# Altium PCB pcb_LAB_GNDplane.PcbDoc
Units mil, origin at the board's own origin, x right, y up, seen from the top; angles counter-clockwise.
Board outline 10930 x 11320 mil, 2 copper layers (Top Layer, Bottom Layer); 127 components, 63 nets, 386 pads, 33 vias.
Unrouted connection lines stored in the file: 1.
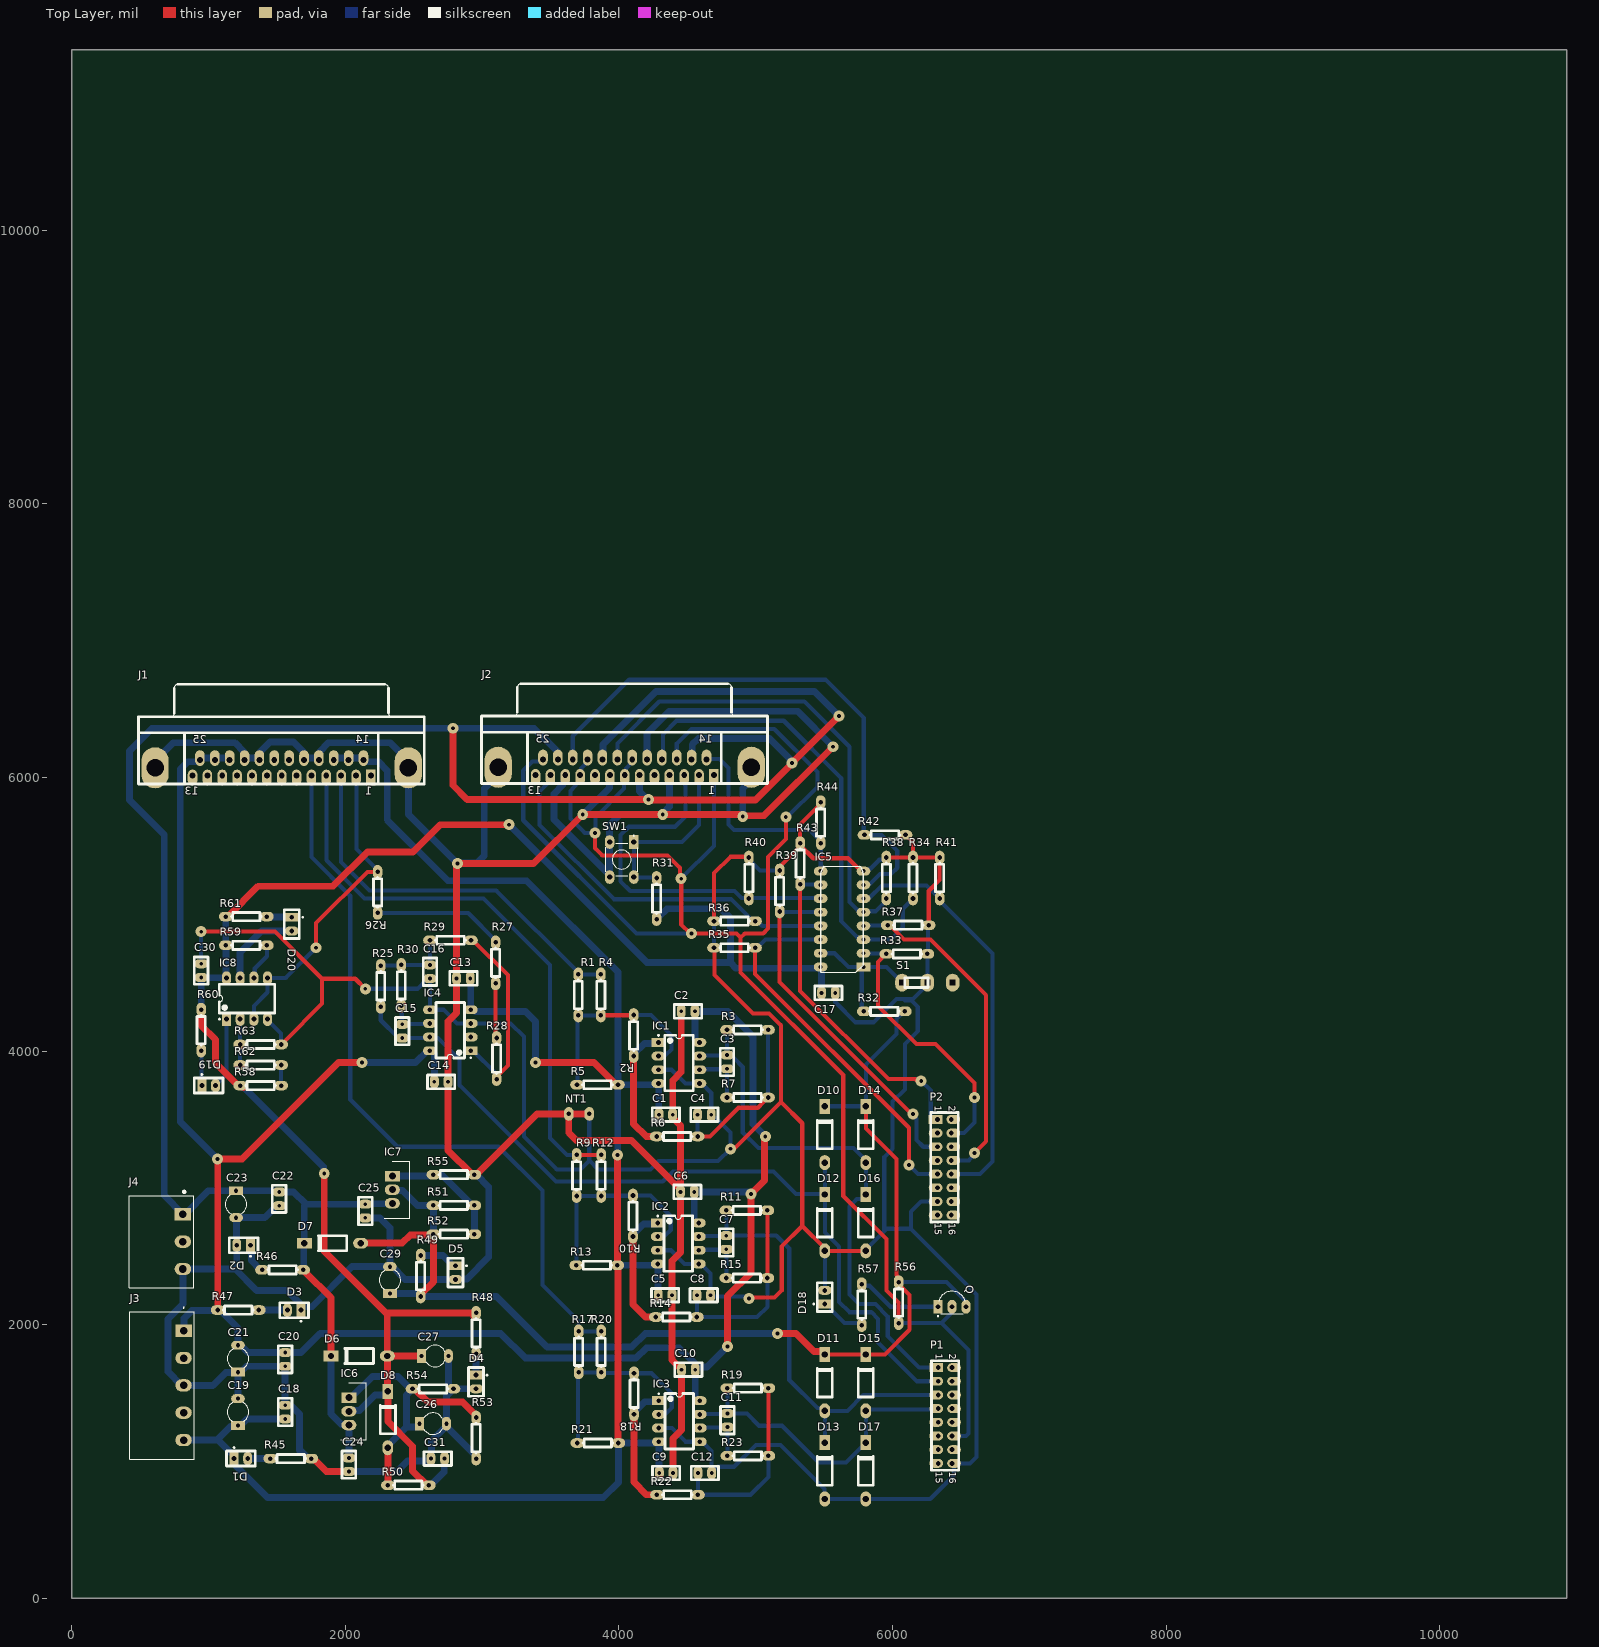
[diagram p0: Top Layer view]
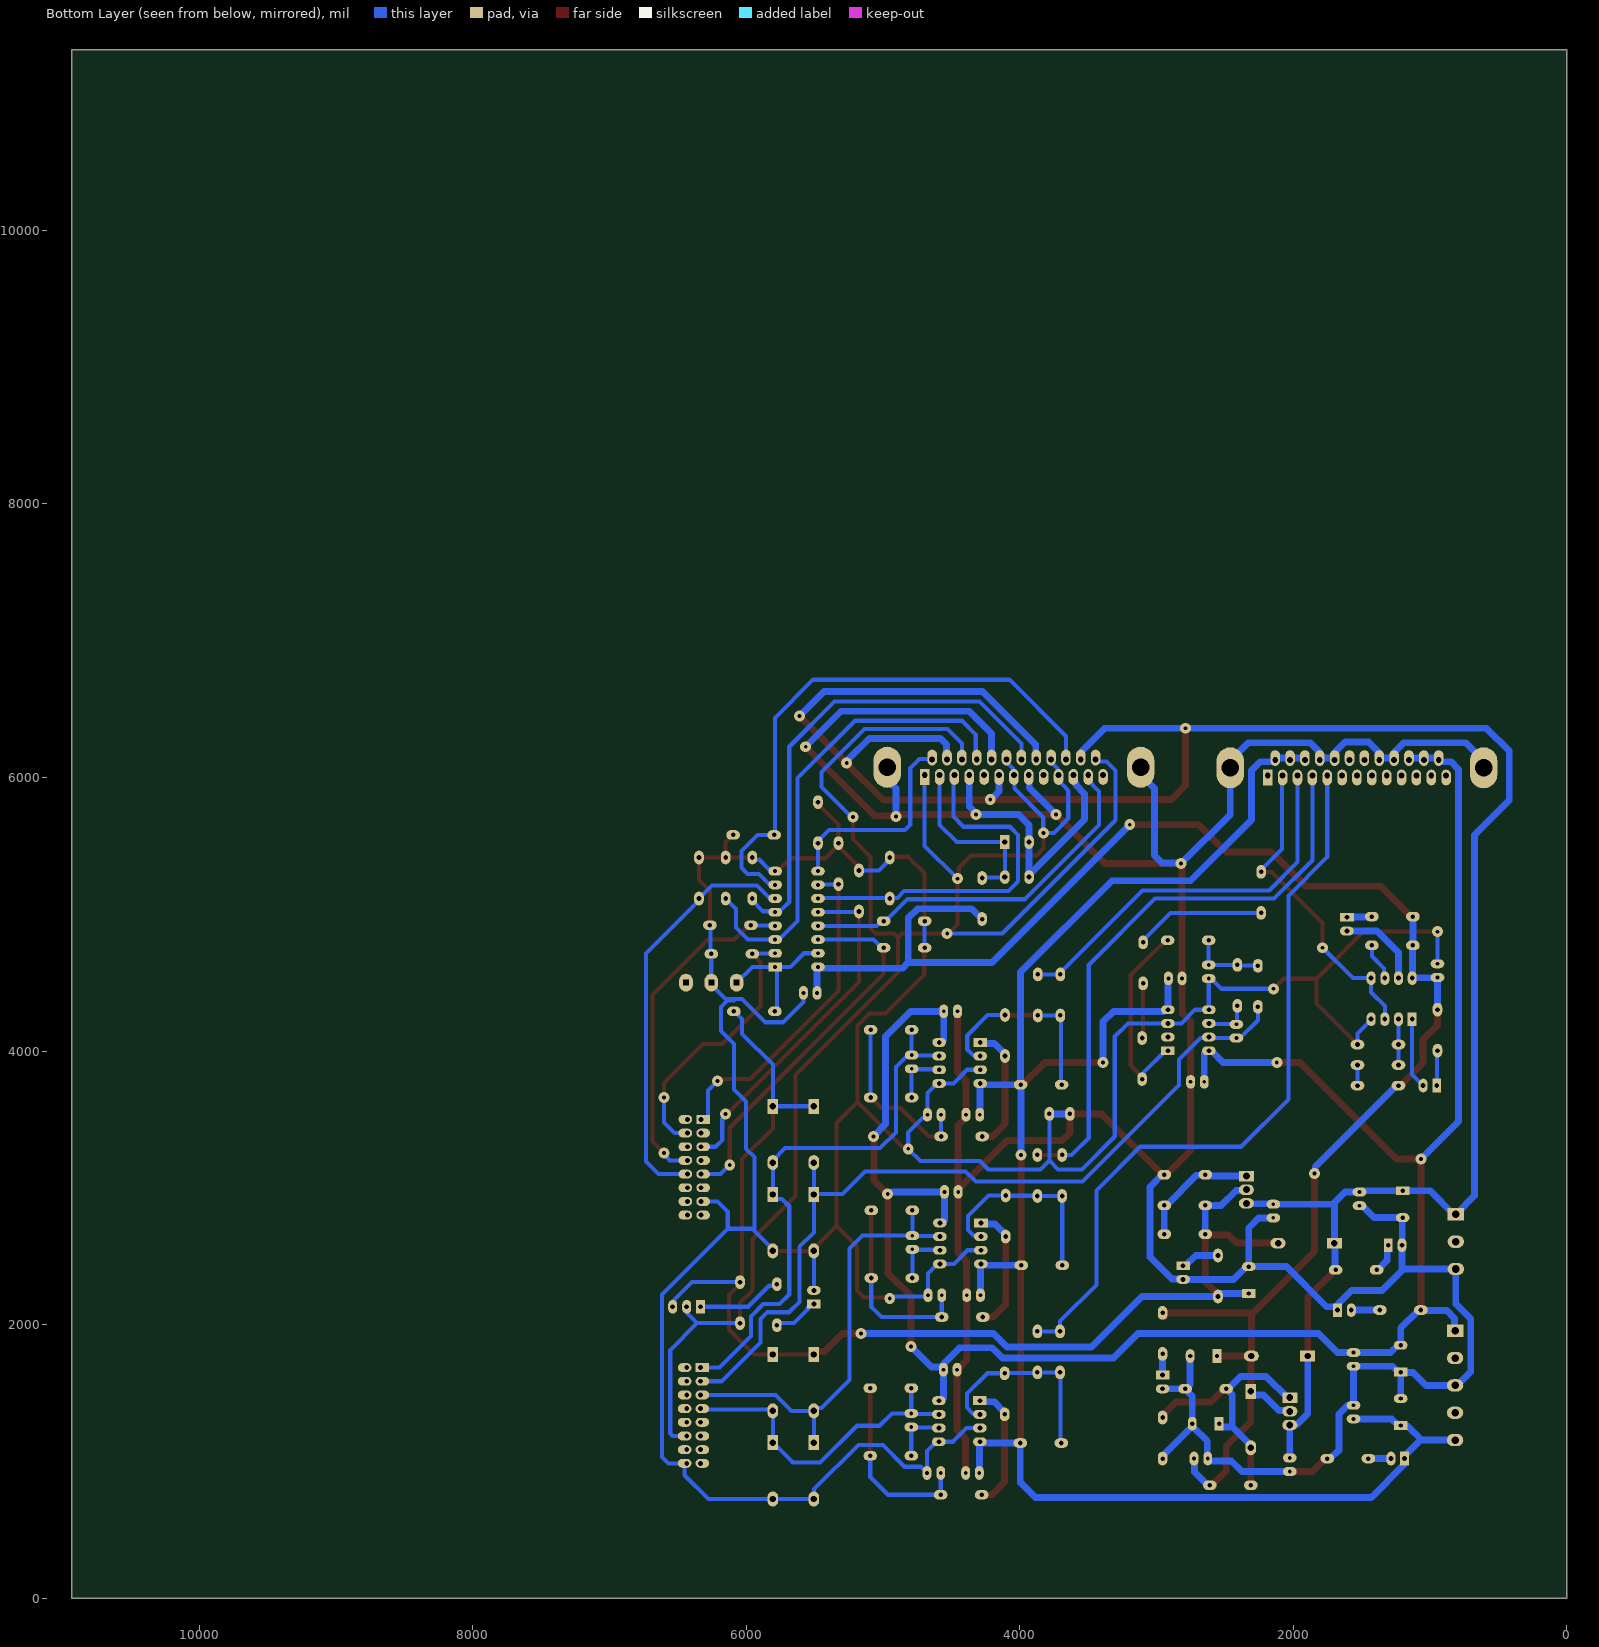
[diagram p1: Bottom Layer view, seen from below]

## Layer stack, top to bottom
Top Solder: solder mask 0.4, Solder Resist, Dk 3.5
Top Layer: signal copper 1.4
Dielectric 1: dielectric 12.6, FR-4, Dk 4.8
Bottom Layer: signal copper 1.4
Bottom Solder: solder mask 0.4, Solder Resist, Dk 3.5

## Board outline
0,0 10930,0 10930,11320 0,11320

## Design rules (kind name [scope] priority, off if disabled: settings)
Clearance [All] p1: gap=40 ignorepadtopadclearanceinfootprint=FALSE except(10: Arc-SMDPad Arc-Text Arc-Hole Track-SMDPad Track-Text Track-Hole SMDPad-SMDPad SMDPad-THPad SMDPad-Text SMDPad-Hole THPad-THPad THPad-Text THPad-Hole Via-Text Via-Hole Fill-Text Fill-Hole Poly-Text Poly-Hole Region-Text Region-Hole Text-Text Text-Hole; 30: Arc-Arc Arc-Track Arc-THPad Arc-Via Track-Track Track-THPad Track-Via SMDPad-Via THPad-Via Via-Via)
PolygonConnect [All] p1: connectstyle=Relief reliefconductorwidth=10 reliefentries=4 polygonreliefangle="90 Angle" airgapwidth=10
RoomDefinition Texas_ADC [InComponentClass('Texas_ADC')] p1: confinementstyle=ConfineIn formatcopy=TRUE lockcomponents=FALSE outline 6762.5,530.11 6762.5,3795 5393.29,3795 5393.29,530.11
RoomDefinition Guasch_Control [InComponentClass('Guasch_Control')] p2: confinementstyle=ConfineIn formatcopy=TRUE lockcomponents=FALSE outline 5400,4860 5400,6735 2715,6735 2715,4860
RoomDefinition CurrentU_Signal [InComponentClass('CurrentU_Signal')] p3: confinementstyle=ConfineIn formatcopy=TRUE lockcomponents=FALSE outline 5247.35,4635 3560,4635 3560,3270 5247.35,3270
RoomDefinition PWM_Driver [InComponentClass('PWM_Driver')] p4: confinementstyle=ConfineIn formatcopy=TRUE lockcomponents=FALSE outline 6870,5895 4521.3,5895 4521.3,4065 6870,4065
RoomDefinition CurrentV_Signal [InComponentClass('CurrentV_Signal')] p5: confinementstyle=ConfineIn formatcopy=TRUE lockcomponents=FALSE outline 5242.35,3321.58 3555,3321.58 3555,1950 5242.35,1950
RoomDefinition Voltage_Signal [InComponentClass('Voltage_Signal')] p6: confinementstyle=ConfineIn formatcopy=TRUE lockcomponents=FALSE outline 2115,3645.16 3457.9,3645.16 3457.9,5385 2115,5385
RoomDefinition Power_Supply [InComponentClass('Power_Supply')] p7: confinementstyle=ConfineIn formatcopy=TRUE lockcomponents=FALSE outline 340,3525 340,555 3265,555 3265,3525
RoomDefinition Guasch_Sensor [InComponentClass('Guasch_Sensor')] p8: confinementstyle=ConfineIn formatcopy=TRUE lockcomponents=FALSE outline 2828.78,5694.92 2828.78,6724.92 353.78,6724.92 353.78,5694.92
RoomDefinition VDC_Indicator [InComponentClass('VDC_Indicator')] p9: confinementstyle=ConfineIn formatcopy=TRUE lockcomponents=FALSE outline 707.02,5147.96 707.02,3527.96 1729.52,3527.96 1729.52,5147.96
RoomDefinition CurrentW_Signal [InComponentClass('CurrentW_Signal')] p10: confinementstyle=ConfineIn formatcopy=TRUE lockcomponents=FALSE outline 5250,2010 3562.65,2010 3562.65,650.16 5250,650.16
RoomDefinition Texas_PWM [InComponentClass('Texas_PWM')] p11: confinementstyle=ConfineIn formatcopy=TRUE lockcomponents=FALSE outline 6135,2610 6675,2610 6675,3990 6135,3990
RoutingVias [All] p1: holewidth=30 width=80 viastyle="Through Hole" minholewidth=30 minwidth=80 maxholewidth=30 maxwidth=80
SolderMaskExpansion [All] p1: expansion=4 istentingtop=FALSE
SupplyNets "Schematic Supply Nets_6" [InNet('sigGND')] p1: voltage=0.000
SupplyNets "Schematic Supply Nets_5" [InNet('GND')] p2: voltage=0.000
SupplyNets "Schematic Supply Nets_4" [InNet('+12V')] p3: voltage=0.000
SupplyNets "Schematic Supply Nets_3" [InNet('+5V')] p4: voltage=0.000
SupplyNets "Schematic Supply Nets_2" [InNet('+3V3')] p5: voltage=0.000
SupplyNets "Schematic Supply Nets_1" [InNet('-15V')] p6: voltage=0.000
SupplyNets "Schematic Supply Nets" [InNet('+15V')] p7: voltage=0.000
Width Width_sigGND [InNet('sigGND')] p1: maxlimit=30 minlimit=30 preferedwidth=30
Width Width_Supply [InNetClass('Supply')] p2: maxlimit=50 minlimit=50 preferedwidth=50
Width Width_5V [InNet('+5V')] p3: maxlimit=50 minlimit=50 preferedwidth=50
Width Width_3V3 [InNet('+3V3')] p4: maxlimit=50 minlimit=30 preferedwidth=30 minimp=50.000000 maximp=50.000000 favimp=50.000000
Width [All] p5: maxlimit=50 minlimit=30 preferedwidth=30
30 further rules are at their usual default settings.

## Classes and differential pairs
component class main: NT1
net class Supply: +12V +15V -15V GND
component class Voltage_Signal: C13 C14 C15 C16 IC4 R25 R26 R27 R28 R29 R30
component class VDC_Indicator: C30 D19 D20 IC8 R58 R59 R60 R61 R62 R63
component class Texas_PWM: P2
component class Texas_ADC: D10 D11 D12 D13 D14 D15 D16 D17 D18 P1 Q R56 R57
component class PWM_Driver: C17 IC5 R32 R33 R34 R35 R36 R37 R38 R39 R40 R41 R42 R43 R44 S1
component class Power_Supply: C18 C19 C20 C21 C22 C23 C24 C25 C26 C27 C29 C31 D1 D2 D3 D4 D5 D6 D7 D8 IC6 IC7 J3 J4 R45 R46 R47 R48 R49 R50 R51 R52 R53 R54 R55
component class Guasch_Sensor: J1
component class Guasch_Control: J2 R31 SW1
component class CurrentW_Signal: C9 C10 C11 C12 IC3 R17 R18 R19 R20 R21 R22 R23
component class CurrentV_Signal: C5 C6 C7 C8 IC2 R9 R10 R11 R12 R13 R14 R15
component class CurrentU_Signal: C1 C2 C3 C4 IC1 R1 R2 R3 R4 R5 R6 R7

## Components (designator, comment, footprint, x,y, rotation, side; value= is the part's Value field where it differs from the comment)
C1 "Cap No Pol" RAD-0.1_mod 4342.35,3534.27 r0 top value=100nF
C2 "Cap No Pol" RAD-0.1_mod 4505,4290 r0 top value=100nF
C3 "Cap No Pol" RAD-0.1_mod 4790,3920 r90 top value=10nF
C4 "Cap No Pol" RAD-0.1_mod 4624.85,3534.27 r0 top value=47nF
C5 "Cap No Pol" RAD-0.1_mod 4337.35,2214.27 r0 top value=100nF
C6 "Cap No Pol" RAD-0.1_mod 4500,2970 r0 top value=100nF
C7 "Cap No Pol" RAD-0.1_mod 4785,2600 r90 top value=10nF
C8 "Cap No Pol" RAD-0.1_mod 4619.85,2214.27 r0 top value=47nF
C9 "Cap No Pol" RAD-0.1_mod 4345,914.43 r0 top value=100nF
C10 "Cap No Pol" RAD-0.1_mod 4507.65,1670.16 r0 top value=100nF
C11 "Cap No Pol" RAD-0.1_mod 4792.65,1300.16 r90 top value=10nF
C12 "Cap No Pol" RAD-0.1_mod 4627.5,914.43 r0 top value=47nF
C13 "Cap No Pol" RAD-0.1_mod 2862.65,4530.73 r180 top value=100nF
C14 "Cap No Pol" RAD-0.1_mod 2700,3775 r180 top value=100nF
C15 "Cap No Pol" RAD-0.1_mod 2415,4145 r270 top value=10nF
C16 "Cap No Pol" RAD-0.1_mod 2617.9,4579.74 r90 top value=47nF
C17 "Cap No Pol" RAD-0.1_mod 5531.3,4425 r0 top value=100nF
C18 "Cap No Pol" RAD-0.1_mod 1558.84,1360.01 r90 top value=100nF
C19 "Cap Pol" CAPR5-4X5_mod 1213.84,1360.01 r90 top value=220uF
C20 "Cap No Pol" RAD-0.1_mod 1558.84,1745.01 r90 top value=100nF
C21 "Cap Pol" CAPR5-4X5_mod 1213.84,1750.01 r90 top value=220uF
C22 "Cap No Pol" RAD-0.1_mod 1515,2919.09 r270 top value=100nF
C23 "Cap Pol" CAPR5-4X5_mod 1200,2880 r270 top value=220uF
C24 "Cap No Pol" RAD-0.1_mod 2025,975 r270 top value=100nF
C25 "Cap No Pol" RAD-0.1_mod 2145,2830 r270 top value=220uF
C26 "Cap Pol" CAPR5-4X5_mod 2640,1275 r0 top value=10uF
C27 "Cap Pol" CAPR5-4X5_mod 2655,1770 r0 top value=1uF
C29 "Cap Pol" CAPR5-4X5_mod 2325,2325 r90 top value=10uF
C30 "Cap No Pol" RAD-0.1_mod 945,4587.55 r90 top value=100nF
C31 "Cap No Pol" RAD-0.1_mod 2675,1020 r180 top value=100nF
D1 "LED1" PIN2_mod 1185,1020 r0 top
D2 "LED1" PIN2_mod 1305,2580 r180 top
D3 "LED1" PIN2_mod 1675,2105 r180 top
D4 "LED1" PIN2_mod 2955,1630 r270 top
D5 "LED1" PIN2_mod 2805,2430 r270 top
D6 "Diode 1N4007" DO-41_mod 2100,1770 r180 top
D7 "Diode 1N4007" DO-41_mod 1905,2595 r180 top
D8 "Diode 1N4007" DO-41_mod 2310,1305 r90 top
D10 "Diode BAT54" DO-41_mod 5505,3390 r90 top
D11 "Diode BAT54" DO-41_mod 5505,1575 r90 top
D12 "Diode BAT54" DO-41_mod 5505,2745 r90 top
D13 "Diode BAT54" DO-41_mod 5505,930 r90 top
D14 "Diode BAT54" DO-41_mod 5805,3390 r90 top
D15 "Diode BAT54" DO-41_mod 5805,1575 r90 top
D16 "Diode BAT54" DO-41_mod 5805,2745 r90 top
D17 "Diode BAT54" DO-41_mod 5805,930 r90 top
D18 "LED1" PIN2_mod 5505,2150 r90 top
D19 "LED1" PIN2_mod 950,3747.55 r0 top
D20 "LED1" PIN2_mod 1607.02,4977.96 r270 top
IC1 "OPAMP" DIP-8_mod 4438.48,3913.04 r0 top
IC2 "OPAMP" DIP-8_mod 4433.48,2593.04 r0 top
IC3 "OPAMP" DIP-8_mod 4441.14,1293.21 r0 top
IC4 "OPAMP" DIP-8_mod 2766.51,4151.96 r180 top
IC5 "CD74HC367E" DIP-16_mod 5631.3,4965 r180 top
IC6 "LM317AT_NOPB" TO254_mod 2025,1465 r270 top
IC7 "LM317AT_NOPB" TO254_mod 2342.5,3085.76 r270 top
IC8 "LM393P" DIP-8_mod 1280,4382.96 r90 top
J1 "D Connector 25" DSUB1.385-2H25A_mod 1533.78,6444.92 r180 top
J2 "D Connector 25" DSUB1.385-2H25A_mod 4042.2,6449.02 r180 top
J3 "5-Pin Header (supply)" MSTBA_5-PIN_HEADER_mod 658.84,1555.01 r270 top
J4 "3-Pin Header (supply)" MSTBA_3-PIN_HEADER_mod 811,2605.99 r270 top
NT1 "NT_GND" NetTie_GND 3707.91,3540 r180 top net-tie
P1 "Header 8X2" HDR2X8_mod 6335,1685 r270 top
P2 "Header 8X2" HDR2X8_mod 6330,3500 r270 top
Q "BC557BRL1G" TO92260P520H933-3_mod 6435,2173.8 r0 top
R1 "Res1" AXIAL-0.3_mod 3702.35,4410 r270 top value=68k
R2 "Res1" AXIAL-0.3_mod 4107.35,4113.48 r270 top value=6k8
R3 "Res1" AXIAL-0.3_mod 4940,4155 r180 top value=6k8
R4 "Res1" AXIAL-0.3_mod 3867.35,4410 r270 top value=68k
R5 "Res1" AXIAL-0.3_mod 3842.91,3753.48 r180 top value=68k
R6 "Res1" AXIAL-0.3_mod 4424.85,3375 r0 top value=6k8
R7 "Res1" AXIAL-0.3_mod 4940,3660 r180 top value=4k3
R9 "Res1" AXIAL-0.3_mod 3690,3090 r270 top value=68k
R10 "Res1" AXIAL-0.3_mod 4102.35,2793.48 r270 top value=6k8
R11 "Res1" AXIAL-0.3_mod 4935,2835 r180 top value=6k8
R12 "Res1" AXIAL-0.3_mod 3870,3090 r270 top value=68k
R13 "Res1" AXIAL-0.3_mod 3837.91,2433.48 r180 top value=68k
R14 "Res1" AXIAL-0.3_mod 4419.85,2055 r0 top value=6k8
R15 "Res1" AXIAL-0.3_mod 4935,2340 r180 top value=4k3k
R17 "Res1" AXIAL-0.3_mod 3705,1800 r270 top value=68k
R18 "Res1" AXIAL-0.3_mod 4110,1493.64 r270 top value=6k8
R19 "Res1" AXIAL-0.3_mod 4942.65,1535.16 r180 top value=6k8
R20 "Res1" AXIAL-0.3_mod 3870,1800 r270 top value=68k
R21 "Res1" AXIAL-0.3_mod 3845.57,1133.64 r180 top value=68k
R22 "Res1" AXIAL-0.3_mod 4427.5,755.16 r0 top value=6k8
R23 "Res1" AXIAL-0.3_mod 4942.65,1040.16 r180 top value=4k3
R25 "Res1" AXIAL-0.3_mod 2257.9,4473.48 r270 top value=6k8
R26 "Res1" AXIAL-0.3_mod 2235,5160 r270 top value=15k
R27 "Res1" AXIAL-0.3_mod 3097.9,4644.74 r270 top value=12k
R28 "Res1" AXIAL-0.3_mod 3105,3945 r270 top value=6k8
R29 "Res1" AXIAL-0.3_mod 2767.9,4809.74 r180 top value=6k8
R30 "Res1" AXIAL-0.3_mod 2407.9,4479.74 r270 top value=4k3
R31 "Res1" AXIAL-0.3_mod 4275,5115 r270 top value=9k1
R32 "Res1" AXIAL-0.3_mod 5940,4290 r0 top value=9k1
R33 "Res1" AXIAL-0.3_mod 6105,4710 r180 top value=910
R34 "Res1" AXIAL-0.3_mod 6150,5265 r270 top value=910
R35 "Res1" AXIAL-0.3_mod 4845,4755 r0 top value=910
R36 "Res1" AXIAL-0.3_mod 4845,4950 r0 top value=910
R37 "Res1" AXIAL-0.3_mod 6115,4920 r180 top value=910
R38 "Res1" AXIAL-0.3_mod 5955,5265 r270 top value=910
R39 "Res1" AXIAL-0.3_mod 5175,5170.25 r270 top value=910
R40 "Res1" AXIAL-0.3_mod 4950,5265 r270 top value=910
R41 "Res1" AXIAL-0.3_mod 6345,5265 r270 top value=910
R42 "Res1" AXIAL-0.3_mod 5945.25,5580 r180 top value=910
R43 "Res1" AXIAL-0.3_mod 5325,5370 r270 top value=910
R44 "Res1" AXIAL-0.3_mod 5475,5670 r270 top value=910
R45 "Res1" AXIAL-0.3_mod 1600,1020 r0 top value=620
R46 "Res1" AXIAL-0.3_mod 1540,2400 r180 top value=505
R47 "Res1" AXIAL-0.3_mod 1216,2105.99 r180 top value=620
R48 "Res1" AXIAL-0.3_mod 2955,1935 r270 top value=150
R49 "Res1" AXIAL-0.3_mod 2550,2355 r90 top value=68
R50 "Res1" AXIAL-0.3_mod 2460,825 r180 top value=300
R51 "Res1" AXIAL-0.3_mod 2792.5,2870.76 r0 top value=1k
R52 "Res1" AXIAL-0.3_mod 2792.5,2660.76 r0 top value=1k
R53 "Res1" AXIAL-0.3_mod 2955,1170 r270 top value=1k8
R54 "Res1" AXIAL-0.3_mod 2640,1530 r0 top value=1k8
R55 "Res1" AXIAL-0.3_mod 2792.5,3095.76 r0 top value=820
R56 "Res1" AXIAL-0.3_mod 6045,2160 r270 top value=9k1
R57 "Res1" AXIAL-0.3_mod 5775,2145 r270 top value=47
R58 "Res1" AXIAL-0.3_mod 1380,3747.55 r180 top value=47k
R59 "Res1" AXIAL-0.3_mod 1275,4772.96 r180 top value=9k1
R60 "Res1" AXIAL-0.3_mod 945,4152.55 r90 top value=150
R61 "Res1" AXIAL-0.3_mod 1275,4982.96 r180 top value=150
R62 "Res1" AXIAL-0.3_mod 1380,3897.55 r0 top value=2k7
R63 "Res1" AXIAL-0.3_mod 1380,4047.55 r180 top value=1k8
S1 "SW-SPDT" MHDR1X3_mod 6125,4500 r0 top
SW1 "1825910-6" SW_1825910-6-4_mod 4020,5400 r270 top

## Footprints (in the part's own frame and the unit in brackets; to place one, negate y for a bottom-side part, rotate by r counter-clockwise, add the part's x,y. Pads: shape width x height; smd on the part's side, far side on the other; paste and mask are expansions set on the pad)
AXIAL-0.3_mod [mil]
  oval 100x70 hole 33.46: 1(-150,0) 2(150,0)
  silkscreen extent -109,-30 109,30
CAPR5-4X5_mod [mm]
  rect 1.651x2.54 hole 0.8: 1(-2.5,0)
  oval 1.651x2.54 hole 0.8: 2(2.5,0)
  silkscreen extent -1.69,-2 1.82,2
DIP-8_mod [mil]
  rect 100x65 hole 35.43: 1(-150,150)
  oval 100x65 hole 35.43: 2(-150,50) 3(-150,-50) 4(-150,-150) 5(150,-150) 6(150,-50) 7(150,50) 8(150,150)
  silkscreen extent -155,-203 104,206, body extent -142,-203 142,203, height 200
DIP-16_mod [mm]
  rect 2.54x1.651 hole 0.73: 1(-3.97,8.89)
  oval 2.54x1.651 hole 0.73: 2(-3.97,6.35) 3(-3.97,3.81) 4(-3.97,1.27) 5(-3.97,-1.27) 6(-3.97,-3.81) 7(-3.97,-6.35) 8(-3.97,-8.89) 9(3.97,-8.89) 10(3.97,-6.35) 11(3.97,-3.81) 12(3.97,-1.27) 13(3.97,1.27) 14(3.97,3.81) 15(3.97,6.35) 16(3.97,8.89)
  silkscreen extent -3.9,-9.84 3.94,9.91, body extent -3.94,-9.84 3.94,9.84, height 5.27
DO-41_mod [mm]
  oval 2.794x2 hole 1.2: 1(-5.23,0)
  rect 2.794x2 hole 1.2: 2(5.23,0)
  silkscreen extent -2.65,-1.4 2.75,1.4
DSUB1.385-2H25A_mod [mm]
  rect 1.778x2.921 hole 1.09 copper offset 0,0.381: 1(-16.566,10.92)
  oval 1.778x2.921 hole 1.09 copper offset 0,0.381: 2(-13.805,10.92) 3(-11.044,10.92) 4(-8.283,10.92) 5(-5.522,10.92) 6(-2.761,10.92) 7(0,10.92) 8(2.761,10.92) 9(5.522,10.92) 10(8.283,10.92) 11(11.044,10.92) 12(13.805,10.92) 13(16.566,10.92)
  oval 1.778x2.921 hole 1.09 copper offset 0,-0.381: 14(-15.185,8.08) 15(-12.425,8.08) 16(-9.663,8.08) 17(-6.903,8.08) 18(-4.141,8.08) 19(-1.38,8.08) 20(1.38,8.08) 21(4.142,8.08) 22(6.903,8.08) 23(9.664,8.08) 24(12.425,8.08) 25(15.185,8.08)
  oval 5.08x7.62 hole 3.26: 26(-23.526,9.5) 27(23.526,9.5)
  silkscreen extent -26.5,-6 26.6,12.5
HDR2X8_mod [mil]
  rect 65x100 hole 35.43 copper offset 0,-15: 1(0,0)
  oval 65x100 hole 35.43 copper offset 0,15: 2(0,100) 4(100,100) 6(200,100) 8(300,100) 10(400,100) 12(500,100) 14(600,100) 16(700,100)
  oval 65x100 hole 35.43 copper offset 0,-15: 3(100,0) 5(200,0) 7(300,0) 9(400,0) 11(500,0) 13(600,0) 15(700,0)
  silkscreen extent -50,-50 750,150
MHDR1X3_mod [mil]
  oval 100x130 hole 40 square: 1(-55,0) 2(130,0) 3(315,0)
  silkscreen extent -35,-35 135,35
MSTBA_3-PIN_HEADER_mod [mil]
  rect 90x120 hole 55.12: 1(-200,0)
  oval 90x120 hole 55.12: 2(0,0) 3(200,0)
  silkscreen extent -372,-394 336,79
MSTBA_5-PIN_HEADER_mod [mil]
  rect 90x120 / inner oval 90x120 / far side rect 90x120 hole 55.12: 1(-400,157.48)
  oval 90x120 hole 55.12: 2(-200,157.48) 3(0,157.48) 4(200,157.48) 5(400,157.48)
  silkscreen extent -573,-236 539,236
NetTie_GND [mil] "Net Tie for GND, through hole"
  oval 70x100 hole 33.46 mask-100: 0(-75,0) 1(75,0)
  Top Layer region: -50,-25 50,-25 50,25 -50,25
  Bottom Layer region: -50,-25 50,-25 50,25 -50,25
PIN2_mod [mil]
  rect 65x100 hole 35.43: 1(0,0)
  oval 65x100 hole 35.43: 2(100,0)
  silkscreen extent -55,-55 155,86
RAD-0.1_mod [mil]
  oval 65x100 hole 27.56: 1(-50,0) 2(50,0)
  silkscreen extent -100,-50 100,50
SW_1825910-6-4_mod [mm]
  rect 2.54x1.778 hole 0.99: 1(-3.25,2.25)
  oval 2.54x1.778 hole 0.99: 2(3.25,2.25) 3(-3.25,-2.25) 4(3.25,-2.25)
  silkscreen extent -4.54,-3 3,3, body extent -3,-3.9 3,3.9, height 5.01
TO254_mod [mm]
  rect 1.935x2.794 hole 1.29: 1(0,0)
  oval 1.935x2.794 hole 1.29: 2(2.54,0) 3(5.08,0)
  silkscreen extent -2.73,-1.5 7.81,3.2, body extent -2.54,-1.43 7.62,3.14, height 19.38
TO92260P520H933-3_mod [mm]
  rect 1.651x2.54 hole 0.91: 1(-2.6,-1.113)
  oval 1.651x2.54 hole 0.91: 2(0,-1.113) 3(2.6,-1.113)
  silkscreen extent -2.7,-2.94 2.49,1.77

## Part data
C1 C2 C3 C4 C5 C6 C7 C8 C9 C10 C11 C12 C13 C14 C15 C16 C17 C18 C20 C22 C24 C25 C30 C31: "Polarized Capacitor (Radial)", LatestRevisionDate=17-Jul-2002, LatestRevisionNote="Re-released for DXP Platform.", PackageDescription="Polarized Capacitor (Radial); 2 Leads", PackageReference=RB7.6-15, Published=8-Jun-2000, Publisher="Altium Limited"
C19 C21 C23 C26 C27 C29: "Capacitor", PackageDescription="Capacitor; 2 Leads", PackageReference=CAPR5-4X5, Published=23-Sep-2002, Publisher="Altium Limited"
D1 D2 D3 D4 D5 D18 D19 D20: "Typical RED GaAs LED", LatestRevisionDate=08-Jul-2005, LatestRevisionNote="Mech Layer 1 removed.", PackageDescription="LED; 2 Leads", PackageReference=LED-1, Published=8-Jun-2000, Publisher="Altium Limited"
D6 D7 D8: "1 Amp General Purpose Rectifier", Code_JEDEC=DO-204-AL, ComponentLink1Description="Manufacturer Link", ComponentLink1URL=http://www.fairchildsemi.com/, ComponentLink2Description=Datasheet, ComponentLink2URL=http://www.fairchildsemi.com/ds/1N%2F1N4001.pdf, DatasheetVersion=1998, LatestRevisionDate=17-Jul-2002, LatestRevisionNote="Re-released for DXP Platform.", PackageDescription="Diode, Axial; Body 5.2 x 2.7 mm (LxDia. max), Lead Dia. 0.86 mm (max)", PackageReference=DO-41, PackageVersion=Aug-1999, Published=8-Jun-2000, Publisher="Altium Limited"
D10 D11 D12 D13 D14 D15 D16 D17: library part "Diode 11DQ03", "Schottky Rectifier", Code_JEDEC=DO-204-AL, ComponentLink1Description="Manufacturer Link", ComponentLink1URL=http://www.irf.com/, ComponentLink2Description=Datasheet, ComponentLink2URL=http://www.irf.com/product-info/datasheets/data/11dq03.pdf, DatasheetVersion=Dec-1997, LatestRevisionDate=17-Jul-2002, LatestRevisionNote="Re-released for DXP Platform.", PackageDescription="Diode, Axial; Body 5.2 x 2.7 mm (LxDia. max), Lead Dia. 0.86 mm (max)", PackageReference=DO-204AL, Published=8-Jun-2000, Publisher="Altium Limited"
IC1 IC2 IC3 IC4: library part ADTL082, "ADTL082"
IC5: "Integrated Circuit", Manufacturer_Name="Texas Instruments", Mouser Part Number=595-CD74HC367E, Datasheet Link=https://www.ti.com/lit/ds/symlink/cd74hc367.pdf?ts=1619589374451&ref_url=https%253A%252F%252Fwww.ti.com%252Fstore%252Fti%252Fen%252Fp%252Fproduct%252F%253Fp%253DCD74HC367E, Height=5.08mm, Manufacturer_Part_Number=CD74HC367E, Mouser Price/Stock=https://www.mouser.co.uk/ProductDetail/Texas-Instruments/CD74HC367E?qs=xFfolx0DHx1dmtXXzN7naA%3D%3D
IC6 IC7: "Integrated Circuit", Arrow Part Number=LM317AT/NOPB, Manufacturer_Name="Texas Instruments", Mouser Part Number=926-LM317AT/NOPB, Arrow Price/Stock=https://www.arrow.com/en/products/lm317atnopb/texas-instruments?region=nac, Datasheet Link=http://www.ti.com/lit/gpn/lm317a, Height=4.7mm, Manufacturer_Part_Number=LM317AT/NOPB, Mouser Price/Stock=https://www.mouser.co.uk/ProductDetail/Texas-Instruments/LM317AT-NOPB?qs=X1J7HmVL2ZFYFJRcNgsWcQ%3D%3D
IC8: library part LM393N, "Integrated Circuit", Manufacturer_Name="Texas Instruments", Mouser Part Number=926-LM393N, Datasheet Link=https://datasheet.datasheetarchive.com/originals/distributors/Datasheets-SFU2/DSASFU100036444.pdf, Height=5.33mm, Manufacturer_Part_Number=LM393N, Mouser Price/Stock=https://www.mouser.co.uk/ProductDetail/Texas-Instruments/LM393N?qs=QbsRYf82W3HvgSG%252BWhL68w%3D%3D
J1 J2: "Receptacle Assembly, 25 Position, Right Angle", PackageDocument=U, DatasheetDocument=19-Mar-1999, Gender=Receptacle, LatestRevisionDate=17-Jul-2002, LatestRevisionNote="Re-released for DXP Platform.", Orientation="Right Angle", PackageReference=787202, Positions=25, Published=15-Jun-2001, Publisher="Altium Limited"
J3: library part 1736175, "Pluggable Terminal Blocks MSTBA 2,5/ 5-G- 5,08 VPE250", Package=None, Check_prices=https://www.snapeda.com/parts/1736175/Phoenix+Contact/view-part/?ref=eda, MF="Phoenix Contact", MP=1736175, SnapEDA_Link=https://www.snapeda.com/parts/1736175/Phoenix+Contact/view-part/?ref=snap
J4: library part MSTBA_2,5/_3-G-5,08_1757255, "3 Position Terminal Block Header, Male Pins, Shrouded _4 Side_ 0.200 _5.08mm_ 90Â°, Right Angle Through Hole", Package=None, Availability=Unavailable, MF="Phoenix Contact", MP="MSTBA 2,5/ 3-G-5,08 1757255", Price=None, SnapEDA_Link=https://www.snapeda.com/parts/MSTBA%202%2C5/%203-G-5%2C08%201757255/Phoenix%20Contact/view-part/1675378/?ref=snap
NT1: library part NetTIe_GND, "Net Tie for GND, at bottom layer"
P1 P2: "Header, 8-Pin, Dual row", LatestRevisionDate=17-Jul-2002, LatestRevisionNote="Re-released for DXP Platform.", Publisher="Altium Limited"
Q: "Bipolar (BJT) Transistor PNP 45V 100mA 320MHz 625mW Through Hole TO-92-3", Package="TO-92 ON Semiconductor", Arrow_Electronics-Purchase-URL=https://snapeda.com/shop?store=Arrow+Electronics&id=3219064, Availability=Good, BuyPart=https://www.snapeda.com/parts/BC557BRL1G/ON%20Semiconductor/view-part/3219064/?ref=eda, DigiKey-Purchase-URL=https://snapeda.com/shop?store=DigiKey&id=3219064, MF="ON Semiconductor", MP=BC557BRL1G, Price=None, SnapEDA_Link=https://www.snapeda.com/parts/BC557BRL1G/ON%20Semiconductor/view-part/3219064/?ref=snap
R1 R2 R3 R4 R5 R6 R7 R9 R10 R11 R12 R13 R14 R15 R17 R18 R19 R20 R21 R22 R23 R25 R26 R27 R28 R29 R30 R31 R32 R33 R34 R35 R36 R37 R38 R39 R40 R41 R42 R43 R44 R45 R46 R47 R48 R49 R50 R51 R52 R53 R54 R55 R56 R57 R58 R59 R60 R61 R62 R63: "Resistor", LatestRevisionDate=17-Jul-2002, LatestRevisionNote="Re-released for DXP Platform.", PackageDescription="Axial Device, Thru-Hole; 2 Leads; 0.3 in Pin Spacing", PackageReference=AXIAL-0.3, Published=8-Jun-2000, Publisher="Altium Limited"
S1: "SPDT Subminiature Toggle Switch, Right Angle Mounting, Vertical Actuation", ComponentLink1Description="Manufacturer Link", ComponentLink1URL=http://www.apem.com, DatasheetVersion=05-Dec-2000, LatestRevisionDate=17-Dec-2003, LatestRevisionNote="Schematic revised, PCB Footprint replaced.", PackageDescription="Switch; 4 Leads", PackageReference=TL36WW15050, Published=24-Mar-1999, Publisher="Altium Limited"
SW1: "Switch Push Button OFF (ON) SPST Round Button 0.05A 24VDC Momentary Contact PC Pins Thru-Hole", Package=None, Check_prices=https://www.snapeda.com/parts/1825910-6/TE+Connectivity+ALCOSWITCH+Switches/view-part/?ref=eda, Digi-Key_Part_Number=450-1650-ND, MF="TE Connectivity", MP=1825910-6, Purchase-URL=https://pricing.snapeda.com/search/part/1825910-6/?ref=eda, SnapEDA_Link=https://www.snapeda.com/parts/1825910-6/TE+Connectivity+ALCOSWITCH+Switches/view-part/?ref=snap

## Via types
v1: diameter 80, hole 28, Top Layer to Bottom Layer, 33 vias

## Nets (pads, with @x,y where several pads share a name; then routed paths per layer and width w, separated by ;. In a path a pad name is that pad's centre, name@x,y a point inside that pad or via, vN(x,y) a via of type N, cw(c..) or ccw(c..) an arc to the next point about the centre after c; other vN are vias at no path point)
+3V3: C29.1 D7.1 D10.2 D11.2 D14.2 D15.2 IC7.2 Q.3 R32.2 R49.1 R51.1 R52.1 R56.1 | length 9223.3
  Top Layer w30: D11.2 D15.2 5944.04,1780.91 6125,1961.86 6125,2215 R56.1@6045,2295 ; D14.2 5805,3434.79 6030,3209.79 6030,2362.57 6037.35,2355.23 6037.35,2317.65 R56.1
  Top Layer w50: D7.1 2415.01,2595 2474.24,2654.23 2635.97,2654.23 R52.1 2642.5,2312.5 2550,2220 R49.1 ; v1(5160,1935) 5295,1935 5426.83,1803.17 5490.63,1803.17 5505,1788.8 D11.2
  Bottom Layer w30: D10.2 D14.2 5805,3900 6030,4125 6030,4234.18 6085.82,4290 R32.2 ; R56.1 6396.24,2310 6534.49,2171.75 6534.49,2132.87 Q.3
  Bottom Layer w50: C29.1 2538.01,2226.57 2550,2214.59 R49.1 3105,2205 3475,1835 4092.3,1835 4192.3,1935 v1(5160,1935) ; IC7.2@2339.51,2988.75 IC7.2 2347.51,2980.75 2416.35,2980.75 2526.34,2870.76 R51.1 R52.1
+5V: C17.1 C27.1 C30.1 C31.1 D6.1 D8.2 IC5.16 IC6.2 IC8.8 R31.2 R48.1 R50.1 R58.2 R59.2 R60.2 R61.2 | length 12819.3
  Top Layer w50: R60.2 945,4187.55 1050,4082.55 1050,3912.55 1215,3747.55 R58.2 1239.59,3747.55 R58.2@1255,3732.14 ; R61.2 1140,4982.96 1362.04,5205 1910.25,5205 2160,5454.75 2492.88,5454.75 2693.14,5655 v1(3195,5655) ; v1(1845,3105) 1845,2535 2295,2085 ; C27.1 D6.1 ; R50.1 2595,825 2490,930 2490,1110 2310,1290 D8.2 2307.95,1512.95 2307.95,1767.95 D6.1 ; R48.1@2940,2055 R48.1@2940,2070 ; R48.1 2295,2085 ; C17.1 C17.1@5484.17,4422.13 ; 2295,2085 2305.91,2074.09 D6.1
  Bottom Layer w50: R60.2 C30.1 947.29,4535.26 IC8.8@1127.71,4535.26 ; R61.2 R59.2 1127.5,4770.46 1127.5,4535.46 IC8.8@1127.71,4535.26 ; IC8.8 IC8.8@1127.71,4535.26 ; R58.2 1236.53,3741.02 1251.53,3741.02 1839.26,3153.29 1839.26,3110.74 v1(1845,3105) ; IC6.2 2030.01,1370.01 2065.43,1370.01 2067.33,1371.91 2102.78,1371.91 2215.87,1485 2295.63,1485 2310,1499.37 D8.2 ; R50.1 2625,825 2722.13,922.13 2722.13,1017.13 C31.1 ; v1(3195,5655) 4203.23,4646.77 4815,4646.77 ; R31.2 4275,4974.59 4284.24,4983.83 4293.83,4983.83 4350,5040 4747.28,5040 4815,4972.28 4815,4646.77 ; C17.1 5481.3,4608.7 IC5.16 5453.44,4615 5443.44,4605 4856.77,4605 4815,4646.77
+12V: C22.1 C23.1 C24.1 C25.1 D6.2 D7.2 IC6.3 IC7.3 J2.6 J2.15 J2.21 J2.24 J4.1 R46.1 | length 17352.1
  Top Layer w50: R46.1 R46.1@1699.59,2400 ; R46.1@1705,2400 R46.1@1699.59,2400 ; D6.2 1894.1,2195.9 1708.83,2381.17 1708.83,2390.76 R46.1@1699.59,2400 ; IC7.3@2325.59,2885.76 IC7.3 ; v1(2786.67,6360) 2786.67,5943.33 2890,5840 v1(4215,5840) 4220,5835 4997.63,5835 5265,6102.37 v1(5265,6105) v1(5610,6450)
  Bottom Layer w50: R46.1 1694.55,2404.55 1694.55,2590.45 D7.2 1699.1,2869.1 1710,2880 ; D6.2 1894.1,1347.34 1971.43,1270.01 2019.99,1270.01 IC6.3 C24.1 ; IC7.3 2339.61,2882.87 2147.87,2882.87 C25.1 1710,2880 ; J2.24 3549.22,6134.73 3549.22,6190.81 3380.04,6360 v1(2786.67,6360) 585,6360 420,6195 420,5835 675,5580 675,2941.99 J4.1 826,2805.99 998.45,2978.43 C23.1 1484.11,2978.43 1493.44,2969.1 C22.1 1620.9,2969.1 1710,2880 ; J2.21 3882.98,6134.73 3882.98,6242.53 4270.45,6630 5430,6630 v1(5610,6450) ; J2.6 4150.9,5899.1 4210,5840 v1(4215,5840) ; J2.15 4535.18,6134.73 4535.18,6240 4580.18,6285 5100,6285 5250,6135 5250,6128.12 5265,6113.12 v1(5265,6105)
+15V: C1.1 C5.1 C9.1 C13.1 C18.1 C19.1 D1.1 IC1.4 IC2.4 IC3.4 IC4.4 J1.14 J1.15 J1.16 J3.5 R5.1 R13.1 R21.1 | length 14042.2
  Top Layer w50: v1(3390,3915) 3816.39,3915 3977.91,3753.48 R5.1 ; v1(3990,3240) 3988.96,3238.96 3988.96,2434.52 R13.1 3991.74,2429.65 3991.74,1137.47 R21.1 4005.15,1133.64 R21.1@4014.39,1142.88
  Bottom Layer w50: J3.5 1060.01,1155.01 ; C18.1 1279.77,1310.01 1231.34,1261.58 C19.1 1206.34,1254.08 1159.08,1254.08 1060.01,1155.01 ; J1.16 1914.23,6132.57 1923.47,6141.81 2013.7,6141.81 J1.15@2022.93,6132.57 ; J1.15 J1.15@2022.93,6132.57 ; C13.1 2912.65,4509.17 2916.52,4505.31 IC4.4 2938.07,4301.96 2950.03,4290 3315.71,4290 3390,4215.71 v1(3390,3915) ; v1(3990,3240) 3991.46,3241.46 3991.46,3752.02 R5.1 ; R13.1@3990.41,2435.98 R13.1 4252.36,2433.48 4261.93,2443.04 IC2.4 4285.42,2441.11 4285.42,2216.2 C5.1 ; C1.1 4290.42,3536.2 4290.42,3761.11 IC1.4 4266.93,3763.04 4257.36,3753.48 R5.1 ; C9.1@4295,896.93 C9.1 4293.07,916.37 4293.07,1141.28 IC3.4 4269.58,1143.21 4260.01,1133.64 R21.1 3995.57,845.57 3885,735 1428.76,735 1192.5,971.25 1192.5,1012.5 D1.1 1185,1037.5 1067.49,1155.01 1060.01,1155.01 ; J1.15@2022.93,6132.57 2032.17,6141.81 2122.4,6141.81 2131.63,6132.57 J1.14 2131.63,6124.72 2140.87,6115.49 2240.78,6115.49 2305,6051.27 2305,5690.65 2750.65,5245 3324.63,5245 3992.91,4576.71 R5.1
-15V: C2.2 C6.2 C10.2 C14.2 C20.2 C21.2 IC1.8 IC2.8 IC3.8 IC4.8 J1.23 J1.24 J1.25 J3.1 R47.2 | length 15319.2
  Top Layer w50: R47.2 1065.5,2106.49 1065.5,3209.5 v1(1065,3210) 1245,3210 1950,3915 v1(2120,3915) ; v1(4794.16,1840) 4794.16,2206.88 4965,2377.72 v1(4965,2955) 5064.26,3054.26 5064.26,3369.26 v1(5070,3375)
  Bottom Layer w50: J3.1 819.89,1958.57 819.89,2045.72 876.32,2102.16 1062.18,2102.16 R47.2 1081,2105.98 1213.84,1973.14 C21.2 1235.4,1848.43 1288.83,1795.01 C20.2 1675.01,1795.01 1815,1935 3135,1935 3315,1755 4125.43,1755 4200.43,1830 4439.06,1830 C10.2@4554.78,1714.28 ; J1.24 J1.24@1044.63,6132.57 ; v1(1065,3210) 791.58,3483.42 791.58,6059.78 847.28,6115.49 926.69,6115.49 935.93,6124.72 J1.25 935.93,6132.57 945.16,6141.81 1035.39,6141.81 J1.24@1044.63,6132.57 ; J1.23 1153.33,6132.57 1144.09,6141.81 1053.86,6141.81 J1.24@1044.63,6132.57 ; v1(2120,3915) 2512.06,3915 2599.02,4001.96 2629.96,4001.96 2650,3981.91 C14.2 ; C10.2 C10.2@4557.65,1683.61 ; C10.2@4571.55,1697.51 C10.2@4557.65,1683.61 ; IC2.8 4570.04,2743.04 4550,2763.09 C6.2 4941.88,2970 4956.88,2955 v1(4965,2955) ; IC1.8 4575.04,4063.04 4555,4083.09 C2.2 4797.28,4290 4980,4107.28 4980,3465 v1(5070,3375) ; IC3.8 4577.7,1443.21 4557.65,1463.25 C10.2@4557.65,1683.61 ; v1(4794.16,1840) 4644.7,1690.53 4564.58,1690.53 C10.2@4557.65,1683.61
"A/D A2": C7.2 D11.1 D13.2 IC2.7 P1.5 R11.2 | length 3313.5
  Bottom Layer w30: IC2.7 4586.96,2646.52 4781.52,2646.52 C7.2 ; R11.2 C7.2 ; D13.2 D11.1 ; P1.5 5785.96,1485 5670.05,1369.09 D11.1 ; C7.2 5150,2650 5245,2555 5245,1595 5450.48,1389.52 5484.57,1389.52 D11.1
"A/D A3": C11.2 D15.1 D17.2 IC3.7 P1.7 R19.2 | length 2381.1
  Bottom Layer w30: IC3.7 4594.62,1346.69 4789.18,1346.69 C11.2 ; R19.2 C11.2 ; P1.7 6328.3,1378.3 5814.21,1378.3 D15.1 D17.2 5659.09,990 5460.91,990 5190.91,1260 5025,1260 4934.84,1350.16 C11.2
"A/D A4": C15.2 D10.1 D12.2 IC4.7 P1.3 R25.2 | length 6157
  Bottom Layer w30: R25.2 2257.9,4225 2381.2,4101.7 2408.3,4101.7 C15.2 2616.52,4095 2677.33,4095 2835,3937.33 2835,3750 3540,3045 4320,3045 4395,3120 5130,3120 5295,2955 5500.91,2955 D12.2 5505,2674.04 5610,2569.04 5610,2164.93 5684.93,2090 5845,2090 5895,2040 5895,1870 6180,1585 P1.3 ; D12.2@5505,2966.54 D10.1
"A/D A5": C3.2 D14.1 D16.2 IC1.7 P1.1 R3.2 | length 4013.2
  Bottom Layer w30: IC1.7 4591.96,3966.52 4786.52,3966.52 C3.2 ; R3.2 C3.2 ; P1.1 6195.25,1685 5965,1915.25 5965,2060 5875,2150 5755,2150 5685,2220 5685,2865 5738.95,2918.95 5780.63,2918.95 5805,2943.32 D14.1 5805,3199.72 5714.72,3290 5020,3290 4905,3405 4905,3882.1 4839.6,3947.5 4839.47,3947.5 4816.97,3970 C3.2
Fault: J2.1 J2.7 J2.10 J2.16 J2.19 J2.22 J2.25 P1.12 Q.2 R56.2 | length 13636.6
  Top Layer w30: v1(3825,5595) 3825,5482.95 3877.95,5430 4355.18,5430 4445.43,5339.74 4445.43,5269.57 v1(4455,5260) 4455,4926.42 4521.42,4860 v1(4530,4860) 4860,4860 4890,4830 ; v1(5220,5710) 5220,5550 5090,5420 5090,4895 5055,4860 4920,4860 4890,4830 ; R56.2 6045,2160 5955,2250 5955,2625 5640,2940 5640,3825 4890,4575 4890,4830
  Bottom Layer w30: J2.25 3429.2,6115.75 3366.02,6115.75 3300,6049.73 3300,5687.4 4127.4,4860 v1(4530,4860) ; J2.22 3770.45,6112.58 3723.76,6065.89 3723.76,6026.75 J2.10 3716.1,5977.16 3658.7,5919.76 3658.7,5915.32 3645,5901.62 3645,5700 3750,5595 v1(3825,5595) 3827.78,5597.78 3827.78,5709.03 4037.03,5918.28 4037.03,6013.92 J2.7 4049.86,6026.75 4049.86,6065.89 4096.55,6112.58 J2.19 ; J2.16 4422.66,6248.41 4529.25,6355 5135.21,6355 5450.25,6039.96 5450.25,5930.25 5230,5710 v1(5220,5710) ; v1(4455,5260) 4694.7,5499.7 4694.7,6018.8 J2.1 ; R56.2 6358.78,2010 ; P1.12 6537.29,1185 6554.86,1202.57 6554.86,1813.92 6358.78,2010 ; Q.2 6428.3,2123.3 6428.3,2079.53 6358.78,2010
GND: C1.2 C2.1 C5.2 C6.1 C9.2 C10.1 C13.2 C14.1 C18.2 C19.2 C20.1 C21.1 C22.2 C23.2 C24.2 C25.2 C26.2 C27.2 C29.2 C31.2 D2.2 D3.1 D4.2 D5.2 J1.17 J1.18 J1.21 J1.22 J1.26 J1.27 J2.4 J2.8 J2.11 J2.18 J2.26 J2.27 J3.3 J4.3 NT1.1 R45.2 R53.2 R54.2 R55.2 SW1.3 SW1.4 | length 29173.7
  Top Layer w50: R45.2 1765,1020 1860,925 C24.2 ; C9.2 4395,1051.96 4396.14,1053.1 4396.14,1166.19 4457.65,1227.7 C10.1 4457.65,1683.61 4450.72,1690.53 4437.28,1690.53 4387.35,1740.47 C5.2 4387.35,2351.79 4388.48,2352.93 4388.48,2466.02 4450,2527.54 C6.1 C6.1@4450,2987.5 ; C2.1 4455,3847.54 4393.48,3786.02 4393.48,3535.41 C1.2 4392.35,3512.71 4450,3455.06 C6.1@4450,2987.5 ; v1(5564.9,6224.9) 5060.74,5720.74 4910.74,5720.74 v1(4905,5715) 4896.88,5715 4881.88,5730 v1(4320,5730) 4319.95,5730.05 3735.16,5730.05 v1(3735.1,5730.1) 3375,5370 v1(2820,5370) 2820,5361.88 2812.65,5354.54 C13.2 2812.65,4393.21 2811.52,4392.07 2811.52,4278.98 2750,4217.46 C14.1 2750,3273.26 2927.5,3095.76 R55.2 2957.5,3095.76 3401.74,3540 NT1.1 3632.91,3402.09 3690,3345 4092.5,3345 C6.1@4450,2987.5
  Bottom Layer w50: J1.27 607.56,6120.91 740.97,6254.31 1190.6,6254.31 1258.2,6186.72 1258.2,6130.64 J1.22 ; C19.2 C21.1 ; J1.22@1271.27,6141.81 1361.49,6141.81 J1.21@1370.73,6132.57 ; J1.21@1374.55,6130.64 1374.55,6186.72 1447.76,6259.92 1619.8,6259.92 1693,6186.72 J1.18@1693,6130.64 ; C22.2 1497.5,2869.1 1409.98,2781.58 C23.2 1202.5,2779.08 1202.5,2582.5 D2.2 1205,2416.97 1194.01,2405.99 ; D3.1 1667.5,2112.5 1667.5,2153.74 1572.01,2249.23 1350.77,2249.23 1194.01,2405.99 ; D3.1@1675,2122.5 1682.5,2130 1755,2130 2048.42,2423.42 C29.2 ; J1.18@1706.07,6141.81 1796.29,6141.81 J1.17@1805.53,6132.57 ; R45.2 1729.59,1020 1669.59,1080 1665,1080 1665,1345.09 1602.96,1407.14 1561.71,1407.14 C18.2 C20.1 1320.01,1695.01 1274.76,1695 1231.34,1651.58 C21.1 ; J1.17@1809.36,6130.64 1809.36,6186.72 1876.95,6254.31 2326.59,6254.31 2460,6120.91 J1.26 2460,5730 v1(2820,5370) 2825,5375 2960,5375 3015,5430 3015,5920.71 3115.98,6021.69 J2.27 ; C24.2 2375.48,925 2452.98,1002.5 2618.07,1002.5 2625,1009.43 C31.2 2627.87,1022.87 2627.87,1146.95 C26.2@2738.42,1257.5 ; C25.2 2252.5,2780 2325,2707.5 C29.2 ; R54.2@2753.42,1556.99 C27.2 ; R55.2 2957.5,3095.76 3047.5,3005.76 3047.5,2492.5 2887.87,2332.87 2807.87,2332.87 D5.2 2435.92,2330 2342.5,2423.42 C29.2 ; R53.2 2955,1037.96 2738.42,1254.54 C26.2@2738.42,1257.5 ; D4.2 R54.2 2780.41,1530 2771.17,1520.76 2771.17,1511.17 2738.42,1478.42 C26.2 C26.2@2738.42,1257.5 ; J2.11 3607.4,5976.18 3588.7,5957.48 3588.7,5944.31 3525,5880.61 3525,5693.46 SW1.4@3931.42,5287.05 ; v1(3735.1,5730.1) 3929.68,5924.68 3929.68,6015.27 J2.8 ; SW1.4 SW1.4@3931.42,5287.05 ; J2.18 4205.66,6131.31 4205.66,6320.66 4370,6485 5304.79,6485 v1(5564.9,6224.9) ; J2.4 4368.31,5786.42 4320,5738.12 v1(4320,5730) 4008.46,5730 3931.42,5652.95 SW1.3 SW1.4@3931.42,5287.05 ; v1(4905,5715) 4905,5920.99 4968.42,5984.41 J2.26 ; 1194.01,2405.99 J4.3 811,2149.98 701.32,2040.3 701.32,1655.01 801.32,1555.01 J3.3 1030.01,1555.01 1125,1650 1212.26,1650 C21.1
Gsc_VDC: IC8.3 IC8.5 J1.2 R26.1 | length 2344.1
  Top Layer w30: v1(1785,4755) 1785,4935 2160,5310 R26.1
  Bottom Layer w30: IC8.3 1330,4329.61 1430,4429.61 IC8.5 1562.96,4532.96 v1(1785,4755) ; J1.2 2081.46,6010.82 2081.46,5478.54 2235,5325 R26.1
NetC3_1: C3.1 IC1.6 R7.2 | length 417.5
  Bottom Layer w30: IC1.6 4591.96,3866.52 4786.52,3866.52 C3.1 R7.2 R7.2@4787.78,3657.78
NetC4_1: C4.1 R3.1 R6.2 R7.1 | length 1307.4
  Top Layer w30: R6.2 4665,3375 4875,3585 5015,3585 5055.93,3625.93 5055.93,3630.11 5085.82,3660 R7.1 ; C4.1 C4.1@4574.85,3551.77
  Bottom Layer w30: R6.2 C4.1 ; R7.1 R3.1
NetC7_1: C7.1 IC2.6 R15.2 | length 417.5
  Bottom Layer w30: IC2.6 4586.96,2546.52 4781.52,2546.52 C7.1 R15.2 R15.2@4782.78,2337.78
NetC8_1: C8.1 R11.1 R14.2 R15.1 | length 1428.1
  Top Layer w30: C8.1 C8.1@4569.85,2231.77 ; R15.1 R11.1
  Bottom Layer w30: C8.1 R14.2 5010.21,2055 5085,2129.79 R15.1
NetC11_1: C11.1 IC3.6 R23.2 | length 417.5
  Bottom Layer w30: IC3.6 4594.62,1246.69 4789.18,1246.69 C11.1 R23.2 R23.2@4790.44,1037.95
NetC12_1: C12.1 R19.1 R22.2 R23.1 | length 1395.9
  Top Layer w30: C12.1 C12.1@4577.5,931.93 ; R23.1 R19.1
  Bottom Layer w30: C12.1 R22.2 4962.82,755.16 5092.65,885 R23.1
NetC15_1: C15.1 IC4.6 R30.2 | length 342.1
  Bottom Layer w30: R30.2 2411.45,4326.19 2411.45,4198.55 C15.1 2418.48,4198.48 2613.04,4198.48 IC4.6
NetC16_2: C16.2 R25.1 R29.2 R30.1 | length 542.6
  Bottom Layer w30: R25.1 2261.03,4626.61 2404.77,4626.61 R30.1 C16.2 R29.2
NetC26_1: C26.1 D8.1 IC6.1 R50.2 R53.1 R54.1 | length 2038
  Top Layer w50: R50.2 D8.1 ; R54.1 2505,1530 2602.5,1432.5 2857.5,1432.5 2955,1335 R53.1
  Bottom Layer w50: IC6.1 2041.91,1465 2197.82,1620.9 2384.1,1620.9 2475,1530 R54.1@2480.41,1530 ; D8.1 2310,1114.72 2445.28,1250 ; R54.1 R54.1@2480.41,1530 ; C26.1@2541.57,1292.5 C26.1 2541.57,1257.5 2534.07,1250 2445.28,1250 ; 2445.28,1250 2445.28,1485.28 2471.17,1511.17 2471.17,1520.76 R54.1@2480.41,1530
NetD1_2: D1.2 R45.1 | length 165
  Bottom Layer w50: D1.2 R45.1
NetD2_1: D2.1 R46.2 | length 220.8
  Bottom Layer w50: D2.1 1312.5,2572.5 1312.5,2467.91 1380.41,2400 R46.2
NetD3_2: D3.2 R47.1 | length 189.4
  Bottom Layer w50: R47.1 1366.5,2105.49 1554.51,2105.49 D3.2@1555,2105
NetD4_1: D4.1 R48.2 | length 155
  Bottom Layer w50: D4.1 R48.2
NetD5_1: D5.1 R49.2 | length 286.1
  Bottom Layer w50: R49.2 2712.5,2505 2787.5,2430 D5.1
NetD18_1: D18.1 R57.2 | length 341.4
  Bottom Layer w30: D18.1 5522.5,2150 5550,2122.5 5550,2110.29 5650.29,2010 5760,2010 R57.2
NetD19_1: D19.1 R60.1 | length 257.1
  Bottom Layer w30: R60.1 947.5,4000.05 947.5,3750.05 D19.1
NetD19_2: D19.2 IC8.1 | length 518.5
  Bottom Layer w30: D19.2 1130,3827.55 IC8.1
NetD20_1: D20.1 R61.1 | length 184.1
  Bottom Layer w50: R61.1 1427.5,4980.46 1604.52,4980.46 D20.1
NetD20_2: D20.2 IC8.7 | length 629.6
  Bottom Layer w50: IC8.7 1230,4720.24 1387.72,4877.96 D20.2
NetIC1_1: IC1.1 R2.2 R6.1 | length 932.2
  Top Layer w50: R2.2 4107.35,3467.4 4199.75,3375 R6.1
  Bottom Layer w50: R2.2 4107.35,3977.05 4185.84,4055.54 4280.98,4055.54 IC1.1
NetIC1_2: IC1.2 R1.2 R2.1 R4.2 R5.2 | length 1496.7
  Top Layer w30: R5.2 R5.2@3697.63,3758.19 ; R1.2@3697.63,4255.28 R1.2 ; R4.2 3869.09,4261.74 4105.61,4261.74 R2.1 R2.1@4105.3,4265.52
  Bottom Layer w30: R5.2 3697.63,3758.19 3697.63,4255.28 R1.2 R4.2 R4.2@3869.09,4261.74 ; R2.1@4105.61,4261.74 R2.1 4234.19,4263.48 4383.48,4114.18 4383.48,4011.9 4341.32,3969.74 4295.18,3969.74 IC1.2 IC1.2@4286.22,3965.31
NetIC2_1: IC2.1 R10.2 R14.1 | length 932.2
  Top Layer w50: R10.2 4102.35,2147.4 4194.75,2055 R14.1
  Bottom Layer w50: R10.2 4102.35,2657.05 4180.84,2735.54 4275.98,2735.54 IC2.1
NetIC2_2: IC2.2 R9.2 R10.1 R12.2 R13.2 | length 1490.6
  Top Layer w30: R12.2 R12.2@3871.74,2941.74 ; R12.2@3872.91,2947.57 R12.2@3874.96,2945.52 ; R10.1@4100.3,2945.52 R10.1 R10.1@4100.61,2941.74
  Bottom Layer w30: R13.2 3688.96,2434.52 3688.96,2938.96 R9.2 R12.2 3871.74,2941.74 4100.61,2941.74 R10.1 4229.19,2943.48 4378.48,2794.18 4378.48,2691.9 4336.32,2649.74 4290.18,2649.74 IC2.2 IC2.2@4281.22,2645.31
NetIC3_1: IC3.1 R18.2 R22.1 | length 932.2
  Top Layer w50: R18.2 4110,847.57 4202.4,755.16 R22.1
  Bottom Layer w50: R18.2 4110,1357.21 4188.5,1435.71 4283.64,1435.71 IC3.1
NetIC3_2: IC3.2 R17.2 R18.1 R20.2 R21.2 | length 1478
  Top Layer w30: R20.2@3880.57,1647.74 R20.2@3882.61,1645.69 ; R18.1@4107.95,1645.69 R18.1
  Bottom Layer w30: R21.2 3700.28,1138.36 3700.28,1645.28 R17.2 R20.2 ; R20.2@3882.61,1645.69 4107.95,1645.69 R18.1 4236.84,1643.64 4386.14,1494.35 4386.14,1392.07 4343.97,1349.9 4297.83,1349.9 IC3.2 IC3.2@4288.87,1345.47
NetIC4_1: IC4.1 R28.2 R29.1 | length 1465
  Top Layer w30: R29.1 2932.9,4809.74 3187.9,4554.73 3187.9,3892.9 3105,3810 R28.2
  Bottom Layer w30: IC4.1 2934.02,4001.96 3097.35,3838.62 3097.35,3802.65 R28.2
NetIC4_2: IC4.2 R27.2 R28.1 | length 402.7
  Top Layer w30: R27.2 3097.9,4102.1 R28.1
NetIC7_1: IC7.1 R51.2 R52.2 R55.1 | length 907.3
  Bottom Layer w50: IC7.1 2612.09,3085.76 2622.09,3095.76 R55.1 2646.33,3091.93 2706.33,3091.93 2927.5,2870.76 R51.2 R52.2
NetJ1_3: J1.3 R1.1 R4.1 | length 2881.4
  Bottom Layer w30: J1.3 1968.58,5381.42 2175,5175 3102.35,5175 3702.35,4575 R1.1 R4.1
NetJ1_4: J1.4 R9.1 R12.1 | length 4263.7
  Top Layer w30: R9.1 R12.1
  Bottom Layer w30: J1.4 1859.88,5394.97 2139.85,5115 3009.85,5115 3495,4629.85 3495,3365 3620,3240 R9.1
NetJ1_5: J1.5 R17.1 R20.1 | length 5471.7
  Bottom Layer w30: J1.5 1751.18,5418.82 2035,5135 2035,3646.8 2381.8,3300 3120,3300 3439.5,2980.5 3439.5,2290.5 3705,2025 R17.1 R20.1
NetQ_1: Q.1 R57.1 | length 626
  Bottom Layer w30: R57.1 5786.57,2283.43 5831.57,2283.43 5985,2130 Q.1
NetR26_2: R26.2 R27.1 | length 960.9
  Bottom Layer w30: R26.2 2617.9,5010 2897.64,5010 3097.9,4809.74 R27.1
NetR58_1: R58.1 R62.2 | length 150
  Bottom Layer w30: R58.1 R62.2
OE: IC5.1 IC5.15 R32.1 S1.1 | length 1020.5
  Bottom Layer w30: IC5.15 5577.28,4715 5677.28,4615 5775,4615 IC5.1 ; R32.1 5775,4305 5775,4602.4 IC5.1 ; S1.1 5955,4615 IC5.1
PWM1_Gsc: IC5.11 J2.3 R40.2 | length 2693.5
  Bottom Layer w30: J2.3 4484.66,6011.44 4484.66,5945.66 4485,5945.32 4485,5715 4410,5640 4071.99,5640 4011.42,5579.43 4011.42,5241.08 4082.49,5170 4844.85,5170 4894.6,5120.25 4944.75,5120.25 R40.2 4952.63,5117.63 5472.37,5117.63 IC5.11
PWM2_Gsc: IC5.5 J2.20 R38.2 | length 3564.3
  Bottom Layer w30: J2.20 3987.85,6248.41 4294.45,6555 5355,6555 5685,6225 5685,5090.5 5738,5037.5 5738.13,5037.5 5760.63,5015 IC5.5 5794.29,5021.7 5876.7,5021.7 5955,5100 R38.2
PWM3_Gsc: IC5.9 J2.14 R44.2 | length 1547.1
  Bottom Layer w30: J2.14 4643.74,6134.58 4734.07,6134.58 4800,6068.66 4800,5655 4840,5615 5117.5,5615 5395,5615 5475,5535 R44.2 IC5.9
PWM3A: IC5.10 P2.1 R43.2 | length 2460.4
  Top Layer w30: R43.2 5325,4440 5970,3795 6167.43,3795 6172.86,3789.57 6200.43,3789.57 v1(6210,3780) ; P2.1@6315,3515 P2.1
  Bottom Layer w30: R43.2 5327.5,5217.5 5472.5,5217.5 IC5.10 ; v1(6210,3780) 6280,3710 6280,3517.5 6297.5,3500 P2.1
PWM3B: IC5.6 P2.10 R41.2 | length 3062
  Bottom Layer w30: IC5.6 5794.29,5121.7 5833.56,5121.7 5921.86,5210 6250,5210 6310.93,5149.07 6315.11,5149.07 6345,5119.18 R41.2 6345,5100 6732,4713 6732,3192 6640,3100 P2.10
PWM4_Gsc: IC5.7 J2.23 R42.2 | length 4153.9
  Bottom Layer w30: J2.23 3661.75,6301.75 4075,6715 5510,6715 5790,6435 5790,5585.25 R42.2 5918.14,5580 6035,5463.14 6035,5340 5990,5295 5907.5,5295 5834.2,5221.7 5794.29,5221.7 IC5.7
PWM4A: IC5.2 P2.4 R33.2 | length 2005.6
  Top Layer w30: R33.2 5950.82,4710 5920.93,4680.11 5920.93,4675.93 5895,4650 5895,4329.75 6174.75,4050 6315,4050 6600,3765 v1(6600,3660)
  Bottom Layer w30: IC5.2 5790.1,4712.5 5952.5,4712.5 R33.2 ; P2.4 6522.5,3400 6600,3477.5 v1(6600,3660)
PWM4B: IC5.14 P2.9 R35.2 | length 2796.3
  Top Layer w30: R35.2 4995,4563.92 6120,3438.92 v1(6120,3167.5)
  Bottom Layer w30: R35.2 5010,4755 5070,4815 IC5.14 ; v1(6120,3167.5) 6187.5,3100 P2.9
PWM5_Gsc: IC5.3 J2.17 R34.2 | length 3536.8
  Bottom Layer w30: J2.17 4321.61,6138.56 4321.61,6315 4421.61,6415 5204.85,6415 5625,5994.85 5625,4950.5 5738,4837.5 5738.13,4837.5 5760.63,4815 IC5.3 5988.14,4815 6075,4901.86 6075,5040 R34.2
PWM5A: IC5.12 P2.5 R39.2 | length 2568.2
  Top Layer w30: R39.2 5175,4505.15 6140.15,3540 v1(6150.21,3540)
  Bottom Layer w30: R39.2 5177.63,5017.63 5472.37,5017.63 IC5.12 ; v1(6150.21,3540) 6150.21,3526.47 6174.57,3502.11 6174.57,3350.43 6225,3300 P2.5
PWM5B: IC5.4 P2.8 R37.2 | length 2501.4
  Top Layer w30: R37.2 5980,4920 6085,4815 6278.14,4815 6685,4408.14 6685,3340 v1(6600,3255)
  Bottom Layer w30: IC5.4 5790.1,4917.5 5962.5,4917.5 R37.2 ; P2.8 6560,3200 6560,3201.47 6600,3241.47 v1(6600,3255)
PWM6_Gsc: IC5.13 J2.12 R36.2 | length 2759.8
  Bottom Layer w30: J2.12 3498.7,5977.16 3420,5898.46 3420,5652.25 3962.25,5110 4820,5110 4980,4950 5012.57,4950 5047.57,4915 IC5.13
RESET: J2.2 R31.1 SW1.1 SW1.2 | length 1319.8
  Bottom Layer w30: R31.1 4271.48,5268.52 4112.11,5268.52 SW1.2 SW1.1 4459.8,5527.95 4585.71,5653.86 J2.2
sigGND: C4.2 C8.2 C12.2 C16.1 C17.2 C30.2 D12.1 D13.1 D16.1 D17.1 D18.2 IC1.3 IC1.5 IC2.3 IC2.5 IC3.3 IC3.5 IC4.3 IC4.5 IC5.8 IC8.4 NT1.0 P1.16 P2.13 R33.1 R34.1 R35.1 R36.1 R37.1 R38.1 R39.1 R40.1 R41.1 R42.1 R43.1 R44.1 R63.1 S1.2 | length 25596.6
  Top Layer w30: v1(945,4872.55) 1485.33,4872.55 1829.4,4528.48 ; R63.1 1534.18,4047.55 1552.65,4066.03 1552.65,4070.2 1829.4,4346.95 1829.4,4528.48 ; v1(2145,4455) 2071.52,4528.48 1829.4,4528.48 ; R35.1 4698.14,4751.86 4698.14,4556.86 4980,4275 5098.14,4275 5185,4188.14 5185,3626.86 ; R36.1 4695,5300.25 4815,5420.25 4944.75,5420.25 R40.1 ; v1(4815,3285) 4824.57,3294.57 4852.7,3294.57 5185,3626.86 ; v1(4950,2190) 4957.6,2197.6 5137.6,2197.6 5190,2250 5190,2569.72 5340,2719.72 ; R39.1@5164.75,5310 R39.1 ; R39.1@5175,5335.25 5175,5345.13 5325,5495.13 R43.1@5325,5505 ; R44.1 5475,5805 5325,5655 R43.1 R43.1@5325,5505 ; IC5.8@5770.1,5315 5675.58,5409.52 5420.48,5409.52 R43.1@5325,5505 ; D16.1 D12.1 5505,2554.72 5340,2719.72 ; R38.1@5936.52,5392.35 5955,5410.82 R38.1 R34.1 ; R42.1 6099.43,5580 6150,5529.43 R34.1 ; R37.1 6265,5054.68 6265,5170.89 6345,5250.89 R41.1 R34.1 ; 5185,3626.86 5340,3471.86 5340,2719.72
  Bottom Layer w30: C30.2 v1(945,4872.55) ; IC8.4 1430,4224.93 1446.17,4208.77 1448.78,4208.77 1530,4127.55 R63.1 ; v1(2145,4455) 2525.66,4455 2600.4,4529.74 C16.1 2617.21,4529.05 2617.21,4302.65 IC4.5 2716.52,4301.96 2816.52,4201.96 IC4.3 3208.04,4201.96 3305,4105 3305,3375.15 3545.15,3135 3718.96,3135 3782.91,3198.95 ; NT1.0 3782.91,3198.95 ; IC2.3 4380.14,2543.04 4480.14,2443.04 IC2.5 4600.98,2443.04 4669.85,2374.18 C8.2 4679.11,2205 4921.47,2205 4936.47,2190 v1(4950,2190) ; IC1.3 4385.14,3863.04 4485.14,3763.04 IC1.5 4605.98,3763.04 4674.85,3694.18 C4.2 4674.85,3526.24 4691.01,3510.07 4709.93,3510.07 4815,3405 v1(4815,3285) 4725,3195 4290,3195 4230,3135 3846.86,3135 3782.91,3198.95 ; IC3.3 4387.79,1243.21 4487.79,1143.21 IC3.5 4608.64,1143.21 4677.5,1074.35 C12.2@4677.5,922.46 ; C12.2 C12.2@4677.5,922.46 ; R35.1 R36.1 ; R40.1 4950,5400 5029.75,5320.25 R39.1 ; D18.2 D12.1 ; C17.2 C17.2 5581.34,4357.94 5729.28,4210 5860,4210 6030,4380 6090,4380 ; IC5.8 5814.57,5315 5832.04,5332.48 5837.22,5332.48 5903.31,5398.56 5938.56,5398.56 R38.1 ; D16.1 5805,2550 5940,2685 ; S1.2@6220,4465 S1.2 R33.1 6260,4715 6260,4915 R37.1 ; S1.2@6227.5,4457.5 6150,4380 6138.14,4380 6090,4380 ; P2.13 6210,2900 6135,2825 6135,2700 ; C12.2@4677.5,922.46 4703.02,947.98 4711.05,947.98 4723.23,960.16 4840.79,960.16 5000.79,1120.16 5179.84,1120.16 5502.98,797.02 5502.98,726.11 D13.1 D17.1 6276.2,724.09 6450,897.9 6450,970 P1.16 6567.5,985 6614.86,1032.36 6614.86,2220.14 6135,2700 ; 5940,2685 5940,3225 6000,3285 6000,3630 6090,3720 6090,4050 6185,4145 6185,4323.14 6138.14,4370 6090,4370 6090,4380 ; 5940,2685 5955,2700 6135,2700
Vcomp_24: IC8.2 R62.1 R63.2 | length 335.4
  Bottom Layer w30: R62.1 R63.2 IC8.2
Vcomp_500: IC8.6 R59.1 | length 279.4
  Bottom Layer w30: IC8.6 1336.7,4539.66 1336.7,4604.66 1425,4692.96 R59.1
pads on no net: J1.1 J1.6 J1.7 J1.8 J1.9 J1.10 J1.11 J1.12 J1.13 J1.19 J1.20 J2.5 J2.9 J2.13 J3.2 J3.4 J4.2 P1.2 P1.4 P1.6 P1.8 P1.9 P1.10 P1.11 P1.13 P1.14 P1.15 P2.2 P2.3 P2.6 P2.7 P2.11 P2.12 P2.14 P2.15 P2.16 S1.3

## Text inside footprints (layer, text, board x,y; h text height)
J1: Top Overlay "25" at 985.14,6249.06 h59.06; Top Overlay "14" at 2175.93,6249.06 h59.06; Top Overlay "13" at 925.87,5875.04 h59.06; Top Overlay "1" at 2195.83,5875.04 h59.06
J2: Top Overlay "1" at 4704.25,5879.13 h59.06; Top Overlay "13" at 3434.29,5879.13 h59.06; Top Overlay "14" at 4684.35,6253.15 h59.06; Top Overlay "25" at 3493.56,6253.15 h59.06
P1: Top Overlay "2" at 6415,1785 h50 r270; Top Overlay "1" at 6315,1785 h50 r270; Top Overlay "15" at 6315,925 h50 r270; Top Overlay "16" at 6415,925 h50 r270
P2: Top Overlay "2" at 6410,3600 h50 r270; Top Overlay "1" at 6310,3600 h50 r270; Top Overlay "15" at 6310,2740 h50 r270; Top Overlay "16" at 6410,2740 h50 r270